# Altium PCB HELIA Lights 2022 V1.0.PcbDoc
Units mm, origin at the board's own origin, x right, y up, seen from the top; angles counter-clockwise.
Board outline 200 x 105.13 mm, 2 copper layers (Top Layer, Bottom Layer); 70 components, 57 nets, 253 pads, 40 vias.
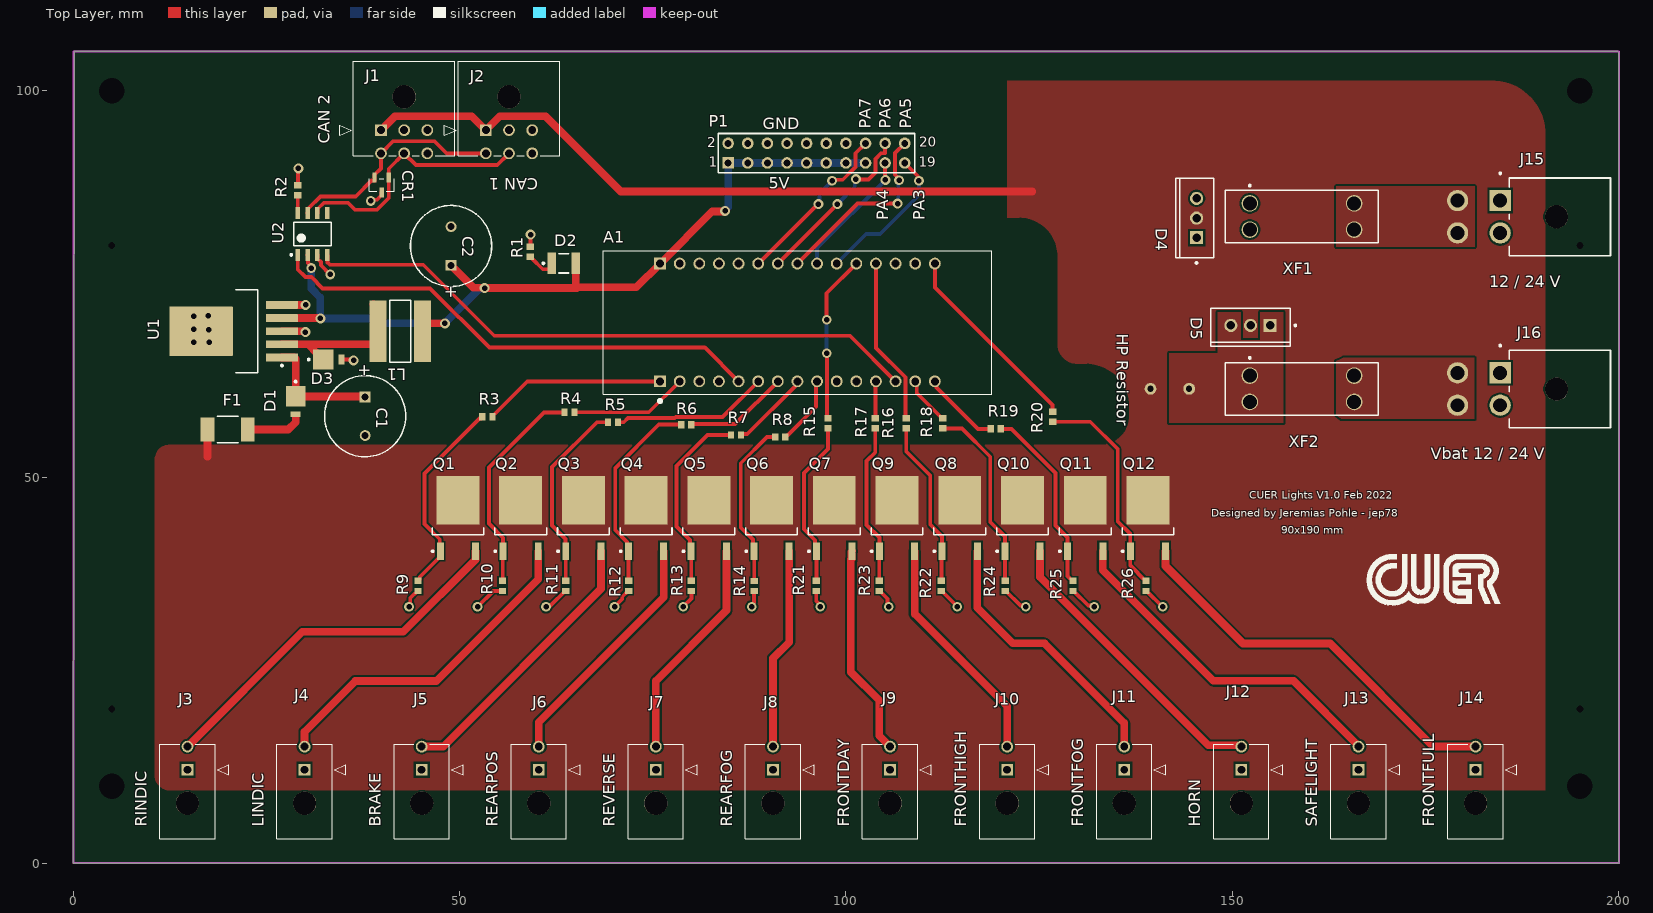
[diagram p0: Top Layer view]
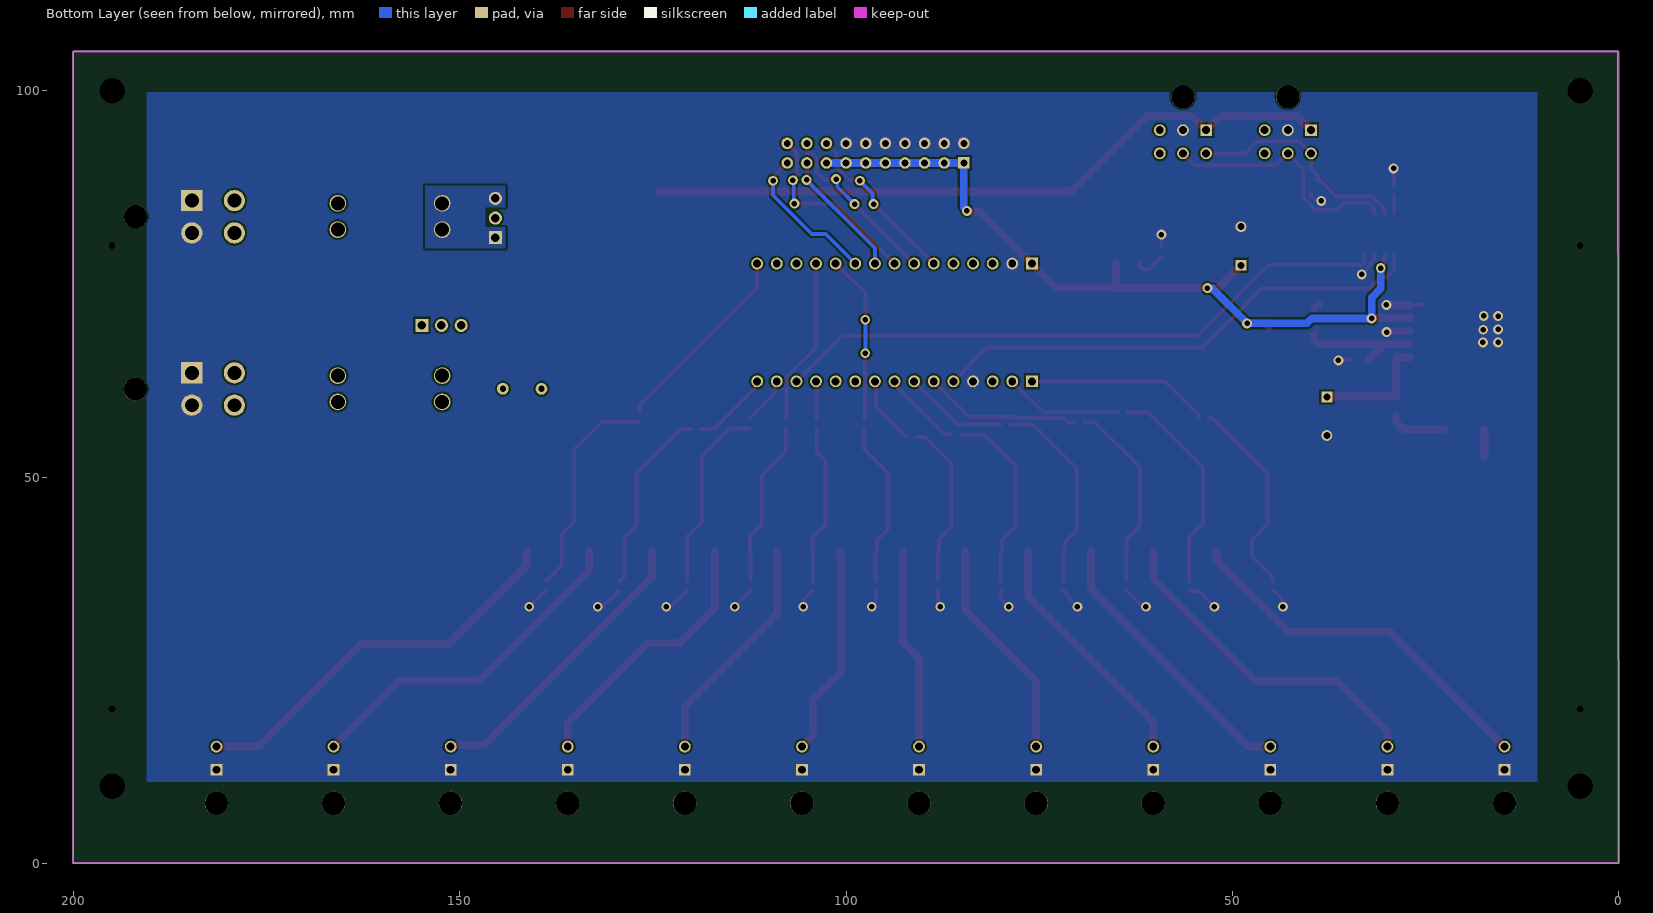
[diagram p1: Bottom Layer view, seen from below]

## Layer stack, top to bottom
Top Solder: solder mask 0.0102, Solder Resist, Dk 3.5
Top Layer: signal copper 0.0356
Dielectric 1: dielectric 0.32, FR-4, Dk 4.6
Bottom Layer: signal copper 0.0356
Bottom Solder: solder mask 0.0102, Solder Resist, Dk 3.5

## Board outline
0,0 200,0 200,105 199.872,105.128 0.156,105.128

## Design rules (kind name [scope] priority, off if disabled: settings)
Clearance [All] p1: gap=0.254 ignorepadtopadclearanceinfootprint=TRUE except(0: Arc-Hole Track-Hole SMDPad-Hole THPad-Hole Via-Hole Fill-Hole Poly-Hole Region-Hole Text-Hole)
FabricationTestPointUsage [All] p1: valid=2 allowmultiple=FALSE
HoleSize [All] p1: absolutevalues=TRUE maxlimit=6.3 minlimit=0.3 maxpercent=80.000 minpercent=20.000
HoleToHoleClearance [All] p1: gap=0.5 allowstackedmicrovias=TRUE
MinimumSolderMaskSliver [All] p1: minsoldermaskwidth=0.1
PolygonConnect [All] p1: connectstyle=Direct reliefconductorwidth=0.508 reliefentries=4 polygonreliefangle="90 Angle" airgapwidth=0.254
RoutingVias [All] p1: holewidth=0.711 width=1.27 viastyle="Through Hole" minholewidth=0.2 minwidth=0.4 maxholewidth=0.711 maxwidth=1.27
SilkToSolderMaskClearance [IsPad] p1: minsilkscreentomaskgap=0.15 clearancetoexposedcopper=TRUE
SolderMaskExpansion [All] p1: expansion=0.05 istentingtop=FALSE
Width [All] p1: maxlimit=1 minlimit=0.175 preferedwidth=0.5
25 further rules are at their usual default settings.

## Classes and differential pairs
component class HELIALights2022V1.0Sheet2: D4 D5 J3 J4 J5 J6 J7 J8 J9 J10 J11 J12 J13 J14 J15 J16 P1 Q1 Q2 Q3 Q4 Q5 Q6 Q7 Q8 Q9 Q10 Q11 Q12 R3 R4 R5 R6 R7 R8 R9 R10 R11 R12 R13 R14 R15 R16 R17 R18 R19 R20 R21 R22 R23 R24 R25 R26 XF1 XF2
component class HELIALights2022V1.0Sheet1: A1 C1 C2 CR1 D1 D2 D3 F1 J1 J2 L1 R1 R2 U1 U2

## Components (designator, comment, footprint, x,y, rotation, side; value= is the part's Value field where it differs from the comment)
A1 "NUCLEO-F303K8" MODULE_NUCLEO-F303K8 93.743,70.013 r90 top
C1 "EEU-FR1C102B" PNSC-EEUFM1H221-2 37.795,57.878 r270 top
C2 "EEU-FR1C102B" PNSC-EEUFM1H221-2 48.912,79.908 r90 top
CR1 "DESD1CAN2SOQ-7" DIODE3_DESD1CAN2SOQ-7_DIO 39.93,87.802 r180 top
D1 "MBRM120LT3G" ONSC-POWERMITE-2-457-04_D_V 28.8,59.141 r270 top
D2 "LTST-C930KGKT" FP-LTST-C930KGKT-MFG 63.506,77.664 r0 top
D3 "MBRM120LT3G" ONSC-POWERMITE-2-457-04_D_V 33.715,65.214 r0 top
D4 "HTR20L120CT" ONSC-TO-220-3-221A-09 145.392,83.523 r180 top
D5 "HTR20L120CT" ONSC-TO-220-3-221A-09 152.374,69.623 r270 top
F1 "1812L035/30DR" FP-1812L035-30DR-MFG 19.998,56.162 r0 top value=0.4-1.7Ω
J1 "430450601" CON_430450601_MOL 39.842,94.898 r180 top
J2 "430450601" CON_430450601_MOL 53.413,94.898 r180 top
J3 "430450202" CON_430450202_MOL 14.8,12.12 r0 top
J4 "430450202" CON_430450202_MOL 29.955,12.12 r0 top
J5 "430450202" CON_430450202_MOL 45.109,12.12 r0 top
J6 "430450202" CON_430450202_MOL 60.264,12.12 r0 top
J7 "430450202" CON_430450202_MOL 75.418,12.12 r0 top
J8 "430450202" CON_430450202_MOL 90.573,12.12 r0 top
J9 "430450202" CON_430450202_MOL 105.727,12.12 r0 top
J10 "430450202" CON_430450202_MOL 136.036,12.12 r0 top
J11 "430450202" CON_430450202_MOL 120.882,12.12 r0 top
J12 "430450202" CON_430450202_MOL 151.191,12.12 r0 top
J13 "430450202" CON_430450202_MOL 166.345,12.12 r0 top
J14 "430450202" CON_430450202_MOL 181.5,12.12 r0 top
J15 "39-30-0040" FP-39-30-0040-MFG 192.233,83.69 r90 top
J16 "39-30-0040" FP-39-30-0040-MFG 192.233,61.398 r90 top
L1 "SRN8040-101M" BOUR-SRN8040-101M_V 42.338,68.881 r0 top
P1 "Header 10X2" HDR2X10 84.77,90.656 r0 top
Q1 "NCE3080K" INF-PG-TO252-3-313_L 49.8,44.7 r90 top
Q2 "NCE3080K" INF-PG-TO252-3-313_L 57.918,44.7 r90 top
Q3 "NCE3080K" INF-PG-TO252-3-313_L 66.036,44.7 r90 top
Q4 "NCE3080K" INF-PG-TO252-3-313_L 74.155,44.7 r90 top
Q5 "NCE3080K" INF-PG-TO252-3-313_L 82.273,44.7 r90 top
Q6 "NCE3080K" INF-PG-TO252-3-313_L 90.391,44.7 r90 top
Q7 "NCE3080K" INF-PG-TO252-3-313_L 98.509,44.7 r90 top
Q8 "NCE3080K" INF-PG-TO252-3-313_L 114.745,44.7 r90 top
Q9 "NCE3080K" INF-PG-TO252-3-313_L 106.627,44.7 r90 top
Q10 "NCE3080K" INF-PG-TO252-3-313_L 122.864,44.7 r90 top
Q11 "NCE3080K" INF-PG-TO252-3-313_L 130.982,44.7 r90 top
Q12 "NCE3080K" INF-PG-TO252-3-313_L 139.1,44.7 r90 top
R1 "2k7" RESC1609X50X30NL8T20 59.176,79.155 r270 top
R2 "10k" RESC1609X50X30NL8T20 29.084,87.123 r90 top
R3 "10k" RESC1609X50X30NL8T20 53.61,57.797 r0 top
R4 "10k" RESC1609X50X30NL8T20 64.243,58.373 r0 top
R5 "10k" RESC1609X50X30NL8T20 69.858,57.096 r0 top
R6 "10k" RESC1609X50X30NL8T20 79.348,56.782 r0 top
R7 "10k" RESC1609X50X30NL8T20 85.789,55.443 r0 top
R8 "10k" RESC1609X50X30NL8T20 91.507,55.181 r0 top
R9 "100k" RESC1609X50X30NL8T20 44.633,35.924 r270 top
R10 "100k" RESC1609X50X30NL8T20 55.576,35.924 r270 top
R11 "100k" RESC1609X50X30NL8T20 63.773,35.928 r270 top
R12 "100k" RESC1609X50X30NL8T20 71.892,35.924 r270 top
R13 "100k" RESC1609X50X30NL8T20 80.017,35.924 r270 top
R14 "100k" RESC1609X50X30NL8T20 88.138,35.893 r270 top
R15 "10k" RESC1609X50X30NL8T20 97.696,56.961 r90 top
R16 "10k" RESC1609X50X30NL8T20 107.823,56.961 r90 top
R17 "10k" RESC1609X50X30NL8T20 103.812,56.961 r90 top
R18 "10k" RESC1609X50X30NL8T20 112.525,56.961 r90 top
R19 "10k" RESC1609X50X30NL8T20 119.398,56.237 r180 top
R20 "10k" RESC1609X50X30NL8T20 126.763,57.816 r90 top
R21 "100k" RESC1609X50X30NL8T20 96.172,35.924 r270 top
R22 "100k" RESC1609X50X30NL8T20 112.346,35.924 r270 top
R23 "100k" RESC1609X50X30NL8T20 104.315,35.924 r270 top
R24 "100k" RESC1609X50X30NL8T20 120.618,35.924 r270 top
R25 "100k" RESC1609X50X30NL8T20 129.399,35.924 r270 top
R26 "100k" RESC1609X50X30NL8T20 138.857,35.924 r270 top
U1 "LM2576S-5.0" KTT0005B_N 20.768,68.881 r180 top
U2 "MCP2551-I/SN" MCHP-SN8_V 30.981,81.458 r90 top
XF1 "3557-2" KSTN-3557-2 159.034,83.723 r0 top
XF2 "3557-2" KSTN-3557-2 159.034,61.423 r0 top

## Footprints (in the part's own frame and the unit in brackets; to place one, negate y for a bottom-side part, rotate by r counter-clockwise, add the part's x,y. Pads: shape width x height; smd on the part's side, far side on the other; paste and mask are expansions set on the pad)
BOUR-SRN8040-101M_V [mm] "SMD, 2-Leads, Body 8x8mm"
  rect 2.2x8 smd: 1(-2.85,0) 2(2.85,0)
  silkscreen extent -1.35,-4 1.35,4, body extent -4,-4 4,4, height 4
CON_430450202_MOL [mm]
  rect 1.52x1.52 hole 1.02 mask+0.076: 1(0,0)
  round 1.52 hole 1.02 mask+0.076: 2(0,3)
  round 3 hole 3 unplated mask+0.076: M1(0,-4.32)
  silkscreen extent -3.57,-8.92 5.35,3.32, body extent 0,0 0.25,0.25, height 0.25
CON_430450601_MOL [mm]
  rect 1.52x1.52 hole 1.02 mask+0.076: 1(0,0)
  round 1.52 hole 1.02 mask+0.076: 2(-3,0) 3(-6,0) 4(0,3) 5(-3,3) 6(-6,3)
  round 3 hole 3 unplated mask+0.076: M1(-3,-4.32)
  silkscreen extent -9.57,-8.92 5.35,3.32, body extent 0,0 0.25,0.25, height 0.25
DIODE3_DESD1CAN2SOQ-7_DIO [mil]
  rect 22x50 smd paste+0 mask+0: 1(-36.02,-38.21) 2(36.02,-38.21) 3(0,38.21)
  silkscreen extent -64,-33 64,33, body extent -59,-49 59,49, height 43
FP-39-30-0040-MFG [mm]
  rect 2.75x2.75 hole 1.8 paste-1000 mask+0: 1(2.095,7.544)
  round 2.75 hole 1.8 paste-1000 mask+0: 2(-2.096,7.544) 3(2.095,13.056) 4(-2.096,13.056)
  round 2.997 hole 2.997 unplated paste-1000 mask+0: ""(0,0.254)
  silkscreen extent -5.02,-6.73 5.74,7.67, body extent -5.12,-6.83 5.12,14.53, height 0.25
FP-1812L035-30DR-MFG [mm]
  rect 1.78x3.15 smd paste+0 mask+0: 1(-2.615,0) 2(2.615,0)
  silkscreen extent -1.35,-1.71 1.35,1.71, body extent -3.6,-1.81 3.6,1.81, height 0.25
FP-LTST-C930KGKT-MFG [mm]
  rect 1.1x2.8 smd paste+0 mask+0: 1(-1.55,0) 2(1.55,0)
  silkscreen extent -2.77,-1.25 0.63,1.25, body extent -2.2,-1.5 2.2,1.5, height 0.25
HDR2X10 [mm] "Connector; Header; 10x2 Position"
  rect 1.5x1.5 hole 0.9: 1(0,0)
  round 1.5 hole 0.9: 2(0,2.54) 3(2.54,0) 4(2.54,2.54) 5(5.08,0) 6(5.08,2.54) 7(7.62,0) 8(7.62,2.54) 9(10.16,0) 10(10.16,2.54) 11(12.7,0) 12(12.7,2.54) 13(15.24,0) 14(15.24,2.54) 15(17.78,0) 16(17.78,2.54) 17(20.32,0) 18(20.32,2.54) 19(22.86,0) 20(22.86,2.54)
  silkscreen extent -1.27,-1.27 24.13,3.81
INF-PG-TO252-3-313_L [mm] "DPAK, 3-Leads, Body 6.5x6.12mm, Pitch 2.28mm, IPC High Density"
  rect 2.25x0.9 smd: 1(-4.3,2.28) 3(-4.3,-2.28)
  rect 6.3x5.55 smd: 2(2.3,0)
  silkscreen extent -4.42,-3.35 -1.25,3.4, body extent -2.15,-3.32 4.07,3.32, height 2.35
KSTN-3557-2 [mm] "Fuse Holder, PCB Mount, Thru-Hole, Body 19.8x6.8mm, Height 7.4mm"
  round 2.15 hole 1.8: 1(-6.75,1.7) 2(-6.75,-1.7) 3(6.75,1.7) 4(6.75,-1.7)
  silkscreen extent -9.9,-3.4 9.9,4.12, body extent -9.91,-3.37 9.91,3.37, height 7.74
KTT0005B_N [mm] "DPAK, 5-Leads, Body 10.65x9.65mm, Pitch 1.7mm, IPC Medium Density"
  rrect10% 4.15x1 smd: 1(-6.25,3.4) 2(-6.25,1.7) 3(-6.25,0) 4(-6.25,-1.7) 5(-6.25,-3.4)
  rrect2% 8.2x6.4 smd: 6(4.2,0)
  silkscreen extent -6.38,-5.35 -0.3,5.35, body extent -3.15,-5.32 6.5,5.33, height 4.83
MCHP-SN8_V [mm] "SOIC, 8-Leads, Body 4.9x3.9mm, Pitch 1.27mm"
  rect 1.55x0.6 smd: 1(-2.7,1.905) 2(-2.7,0.635) 3(-2.7,-0.635) 4(-2.7,-1.905) 5(2.7,-1.905) 6(2.7,-0.635) 7(2.7,0.635) 8(2.7,1.905)
  silkscreen extent -2.82,-2.45 1.53,2.88, body extent -3,-2.45 3,2.45, height 1.75
MODULE_NUCLEO-F303K8 [mm]
  rect 1.53x1.53 hole 1.02: 3.1(-7.62,17.78) 4.1(7.62,17.78)
  round 1.53 hole 1.02: 3.2(-7.62,15.24) 3.3(-7.62,12.7) 3.4(-7.62,10.16) 3.5(-7.62,7.62) 3.6(-7.62,5.08) 3.7(-7.62,2.54) 3.8(-7.62,0) 3.9(-7.62,-2.54) 3.10(-7.62,-5.08) 3.11(-7.62,-7.62) 3.12(-7.62,-10.16) 3.13(-7.62,-12.7) 3.14(-7.62,-15.24) 3.15(-7.62,-17.78) 4.2(7.62,15.24) 4.3(7.62,12.7) 4.4(7.62,10.16) 4.5(7.62,7.62) 4.6(7.62,5.08) 4.7(7.62,2.54) 4.8(7.62,0) 4.9(7.62,-2.54) 4.10(7.62,-5.08) 4.11(7.62,-7.62) 4.12(7.62,-10.16) 4.13(7.62,-12.7) 4.14(7.62,-15.24) 4.15(7.62,-17.78)
  silkscreen extent -10.36,-25.14 9.27,25.14
ONSC-POWERMITE-2-457-04_D_V [mm] "POWERMITE, 2-Leads, Body 1.965x1.9mm"
  rect 2.67x2.54 smd: 1(-1.335,0)
  rect 0.762x1.27 smd: 2(1.016,0)
  silkscreen extent -3.34,-0.12 -3.1,0.13, body extent -2.04,-0.95 -0.08,0.95, height 1.15
ONSC-TO-220-3-221A-09 [mm] "FM, 3-Leads, Body 10.3x4.85mm, Pitch 2.54mm"
  rect 1.7x1.7 hole 1.1: 1(0,2.54)
  round 1.7 hole 1.1: 2(0,0) 3(0,-2.54)
  silkscreen extent -2.2,-5.15 2.7,5.92, body extent -2.18,-5.15 2.67,5.15, height 19.85
PNSC-EEUFM1H221-2 [mm] "THD, 2-Leads, Dia 10.5mm, Body Length 17.5mm, Pin Spacing 5mm"
  rect 1.4x1.4 hole 0.9: 1(-2.5,0)
  round 1.4 hole 0.9: 2(2.5,0)
  silkscreen extent -5.25,-5.25 5.25,5.25, body extent -5.25,-5.25 5.25,5.25, height 17.5
RESC1609X50X30NL8T20 [mm] "Chip Resistor, 2-Leads, Body 1.65x0.95mm, IPC Medium Density"
  rect 0.8x0.95 smd: 1(-0.65,0) 2(0.65,0)
  body extent -0.82,-0.48 0.82,0.48, height 0.5

## Part data
A1: "STM32F303K8, mbed-Enabled Development Nucleo-32 STM32F3 ARMÂ® CortexÂ®-M4 MCU 32-Bit Embedded Evaluation Board", Package=None, Availability=Unavailable, MF=STMicroelectronics, MP=NUCLEO-F303K8, Price=None, SnapEDA_Link=https://www.snapeda.com/parts/NUCLEO-F303K8/STMicroelectronics/view-part/276791/?ref=snap
C1 C2: library part CMP-2000-05313-1, "Aluminum Electrolytic Capacitor, 1000 uF, +/- 20%, 16 V, -40 to 105 degC, 2-Pin THD, RoHS, Tape and Reel", Capacitance=1000µF, Case Size/Dimension=Ø10x16mm, Lifetime@Temperature=8000Hrs@105degC, Manufacturer=Panasonic, Operating Temp Range=-40to+105degC, Operating Temp-Max=105degC, Rated Voltage=16V, Ripple Current=1790mA, Datasheet URL=http://www.produktinfo.conrad.com/datenblaetter/425000-449999/446746-da-01-en-ALU_KONDENSATOR_FR_R_1000_UF_16V.pdf, Datasheet Version=Nov-11, Impedance=0.028O, Manufacturer URL=http://www.panasonic.com/, Series=FR, Type=Radial
CR1: "No Description Available", Mfr_Name="Diodes Inc", Copyright="Copyright (C) 2022 Ultra Librarian. All rights reserved.", Manufacturer_Part_Number=DESD1CAN2SOQ-7, RefDes=RefDes, Type=DEV
D1 D3: library part CMP-1055-00263-1, "Schottky Power Rectifier, 2-Pin Powermite, Pb-Free, Tape and Reel", Manufacturer="On Semiconductor", PartNumber=MBRM120LT1G, ComponentLink1Description="Manufacturer URL", ComponentLink1URL=http://www.onsemi.com/, ComponentLink2Description=Datasheet, ComponentLink2URL=http://www.onsemi.cn/pub_link/Collateral/MBRM120L-D.PDF, ComponentLink3Description="Package Specification", ComponentLink3URL=http://www.onsemi.com/pub_link/Collateral/457-04.PDF, Configuration=Single, DatasheetVersion="Rev. 7", IFSM Max (A)=50, Mounting Technology="Surface Mount", PackageDescription="2-Pin POWERMITE, Body 1.965 x 1.9 mm", PackageReference=POWERMITE-2-457-04, PackageVersion="Rev. F, 05/2013", Packing="Tape and Reel", RoHS=TRUE
D2: library part CMP-2000-06626-2, "LED GREEN CLEAR CHIP SMD", Case Code (Imperial)=1209, Case Code (Metric)=3224, Color=Green, Forward Current=30mA, Forward Voltage=2V, Lens Color=Colorless, Max Operating Temperature=85°C, Min Operating Temperature=-55°C, Package Quantity=1, Power Dissipation=75mW, Reverse Voltage=5V, Test Current=20mA, Case/Package=1209, Depth=2.4mm, Dominant Wavelength=571nm, Height=2.4mm, Illumination Color=Green, Lead Free="Lead Free", Length=3.2mm, Lens Style=Diffused, Lens Transparency=Clear, Luminous Intensity=600mcd, Mount="Surface Mount", Number of Elements=1, Number of LEDs=1, Number of Pins=2, Packaging="Tape and Reel", Power Rating=75mW, Radiation Hardening=No, RoHS Compliant=Yes, Series=-, Viewing Angle=25°, Voltage=5V, Wavelength=574nm, Width=2.4mm
D4 D5: library part CMP-1055-00618-1, "SWITCHMODE(TM) Power Rectifier, 60 V, 30 A, 3-Pin TO-220, Pb-Free, Tube", Manufacturer="On Semiconductor", PartNumber=MBR30H60CTG, ComponentLink1Description="Manufacturer URL", ComponentLink1URL=http://www.onsemi.com/, ComponentLink2Description=Datasheet, ComponentLink2URL=http://www.onsemi.cn/pub_link/Collateral/MBRB30H60CT-D.PDF, ComponentLink3Description="Package Specification", ComponentLink3URL=http://www.onsemi.com/pub_link/Collateral/221A-09.PDF, Configuration="Common Cathode", DatasheetVersion="Rev. 10", IFSM Max (A)=260, Mounting Technology="Through Hole", PackageDescription="3-Pin Flange Mount, Vertical Straight Lead, Body 9.97 x 4.445 mm, Pitch 2.54 mm", PackageReference=TO-220-3-221A-09, PackageVersion="Rev. AG, 09/2011", Packing=Tube, RoHS=TRUE
F1: library part CMP-08606-000005-1, "PTC RESET FUSE 30V 350MA 1812", Ambient Temperature Range High=+85°C, Ambient Temperature Range Low=-40°C, Current Rating=40A, Hold Current=0.35A, Manufacturer="Littelfuse Inc", Package=0, Resistance=0.4-1.7Ω, Temperature="-40°C to +85°C", Trip Current=0.75A, Voltage Rating=30V, Automotive=No, Category=Fuse, ComponentLink2Description=Datasheet, ComponentLink2URL=https://www.littelfuse.com/~/media/electronics/datasheets/resettable_ptcs/littelfuse_ptc_1812l_datasheet.pdf.pdf, Device Class L1="Circuit Protection", Device Class L2="PTC Resettable Fuses", Device Class L3=unset, Digikey Description="PTC RESET FUSE 30V 350MA 1812", Height=1.25mm, Lead Free=Yes, Manufacturer Part Number=1812L035/30DR, Mouser Description="Resettable Fuses - PPTC PTC 30V POLY 1812 HALOGEN-FREE .35A", Octopart=https://octopart.com/1812l035%2F30dr-littelfuse-19645438, RoHS=TRUE, Temperature Range High=+85°C, Temperature Range Low=-40°C, Trip Time=0.15s
J1 J2 J3 J4 J5 J6 J7 J8 J9 J10 J11 J12 J13 J14: "No Description Available", Mfr_Name="Molex Connector Corporation", Copyright="Copyright (C) 2022 Ultra Librarian. All rights reserved.", RefDes=RefDes, Type=DEV
  J1 J2: Manufacturer_Part_Number=430450601
  J3 J4 J5 J6 J7 J8 J9 J10 J11 J12 J13 J14: Manufacturer_Part_Number=430450202
J15 J16: library part CMP-2000-05600-2, "CONN HEADER R/A 4POS 4.2MM", Current Rating=13A, Manufacturer=Molex, Temperature="-40°C to +105°C", Temperature Range High=+105°C, Temperature Range Low=-40°C, Voltage Rating=600V, Automotive=No, Category=Conn, ComponentLink2Description=Datasheet, ComponentLink2URL=https://www.molex.com/webdocs/datasheets/pdf/en-us/0039300040_PCB_HEADERS.pdf, Conn Gender=Male, Conn Orientation="Right Angle", Contact Material=Gold,Nickel, Device Class L1=Connectors, Device Class L2="Headers and Wire Housings", Device Class L3=unset, Digikey Description="CONN HEADER R/A 4POS 4.2MM", Footprint Url=https://www.molex.com/pdm_docs/sd/039300040_sd.pdf, Lead Free=Yes, Manufacturer Part Number=39-30-0040, Mouser Description="Headers & Wire Housings 4 CKT R/A HEADER", Number Of Contacts=4, Number Of Rows=2, Octopart=https://octopart.com/39-30-0040-molex-277428, Package=39-30-0040, Pitch=4.2mm, RoHS=TRUE, Standoff Height=0.4mm
L1: library part CMP-2000-07143-1, "Semi-Shielded Power Inductor, 100 uH, -40 to 125 degC, 2-Pin SMD, RoHS, Tape and Reel", Current, Rating="1 /  / A", Inductance="100 /  / µH", Manufacturer=Bourns, Package Description="2-Pin Surface Mount Device, Body 8 x 8 mm", Tolerance="±20 /  / %", Brand/Series=SRN8040Series, Datasheet URL=http://www.produktinfo.conrad.com/datenblaetter/1000000-1099999/001056456-da-01-en-MAG_ABG_LEIST_IND_SRN8040_101M_100UH_SMD.pdf, Datasheet Version=08/2013, Manufacturer URL=http://www.bourns.com/, Mounting Technology=SurfaceMount, Package Reference=SRN8040-101M, Termination=SMT, Type=Power
P1: "Header, 10-Pin, Dual row", LatestRevisionDate=17-Jul-2002, LatestRevisionNote="Re-released for DXP Platform.", Publisher="Altium Limited"
Q1 Q2 Q3 Q4 Q5 Q6 Q7 Q8 Q9 Q10 Q11 Q12: library part CMP-1164-00349-1, "N-Channel CoolMOS E6 Power-Transistor, 600 V VDS, 7.3 A ID, -55 to 150 degC, PG-TO252-3-313, Reel, Green", Manufacturer=Infineon, PartNumber=IPD60R600C6, ComponentLink1Description="Manufacturer URL", ComponentLink1URL=http://www.infineon.com/, ComponentLink2Description=Datasheet, ComponentLink2URL=http://www.infineon.com/dgdl/IPD60R600C6_2_0.pdf?folderId=db3a30431ff98815012019af55de3f2c&fileId=db3a30432239cccd0122a83152b97d6f, ComponentLink3Description="Package Specification", ComponentLink3URL=http://www.infineon.com/dgdl/PG-TO252-3-313-Package_Overview.pdf?folderId=db3a30432b57a660012b81890ade72d2&fileId=db3a30432b57a660012b8193af2872eb, DatasheetVersion="Rev. 2.0", Green=TRUE, ID (max)="7.3Â A", IDpuls (max)="19Â A", Mounting Technology="Surface Mount", PackageDescription="3-Pin Plastic (Green) Transistor Single Outline Package, 6.5 x 6.12 mm Body, 2.28 mm Pitch", PackageReference=PG-TO252-3-313, PackageVersion=Oct-10, Packing=Reel, Polarity=N, Ptot (max)="63Â W", QG="20.5Â nC", RDS (on) (max)="600Â mOhm", Rth="2Â K/W", RthJA (max)="62Â K/W", RthJC (max)="2Â K/W", Technology="CoolMOS C6", VDS (max)="600Â V", VGS(th) (max)="3.5Â V", VGS(th) (min)="2.5Â V"
R1 R2 R3 R4 R5 R6 R7 R8 R9 R10 R11 R12 R13 R14 R15 R16 R17 R18 R19 R20 R21 R22 R23 R24 R25 R26: library part CMP-2000-03816-5, "Chip Resistor, 0 Ohm, Jumper, 100 mW, -55 to 155 degC, 0603 (1608 Metric), RoHS, Tape and Reel", Manufacturer="Vishay Semiconductor", Max Operating Temperature="155 degC", Min Operating Temperature="-55 degC", Package Quantity=5000, Voltage Rating="75 V", ComponentLink1Description="Manufacturer URL", ComponentLink1URL=http://www.vishay.com/, ComponentLink2Description=Datasheet, ComponentLink2URL=http://www.vishay.com/docs/20035/dcrcwe3.pdf, DatasheetVersion=06/2012, Height="0.45 mm", Length="1.55 mm", Mount="Surface Mount", Mounting Technology="Surface Mount", PackageDescription="2-Pin Surface Mount Device, Body 1.575 x 0.85 mm", PackageReference=0603, Packaging="Tape and Reel", Pins=2, REACH SVHC=Unknown, RoHSCompliant=true
U1: library part CMP-0069-00115-3, "SIMPLE SWITCHER® 3A Step-Down Voltage Regulator, 5-pin TO-263", Manufacturer="Texas Instruments", PackageTopMarking="NSUZXYTTE#*LM2576S*-5.0 P+", PowerWise=N, Code_JEDEC=MO-169-AB, ComponentLink1Description="Datasheet URL", ComponentLink1URL=http://www.ti.com/general/docs/lit/getliterature.tsp?genericPartNumber=LM2576&fileType=pdf, CompType=Switcher, PackageDescription="TO-263, Molded, .400 x .390 x .180in, 5 Lead, .067in Pitch, Surface Mount", PackageReference=KTT0005B, PinCount=5, RoHS=N
U2: library part CMP-0186-00138-3, "High-Speed CAN Transceiver, /  1 Mb/s, 4.5 to 5.5 V, 8-Pin SOIC (SN), Industrial Temperature, RoHS, Tube", Manufacturer=Microchip, ComponentLink1Description="Manufacturer URL", ComponentLink1URL=http://www.microchip.com/, ComponentLink2Description=Datasheet, ComponentLink2URL=http://ww1.microchip.com/downloads/en/DeviceDoc/21667f.pdf, ComponentLink3Description="Package Specification", ComponentLink3URL=http://www.microchip.com/stellent/groups/techpub_sg/documents/packagingspec/en012702.pdf, DatasheetVersion="Rev. F, 07/2010", Mounting Technology="Surface Mount", PackageDescription="8-Pin Small Outline Integrated Circuit, Body 4.9 x 3.9 mm, Pitch 1.27 mm", PackageReference=SN8, RoHSCompliant=true
XF1 XF2: library part CMP-2000-05461-1, "FUSE HOLDER, PCB MOUNT, 500VAC, 20A, ROHS", Current Rating=30A, Manufacturer=Keystone-Electronics, Voltage=500V, Category=CircuitProtection, Contact Finish=TinNickel, Contact Material=Brass, Datasheet URL=http://datasheet.octopart.com/3557-2-Keystone-datasheet-15715937.pdf, Datasheet Version=Apr-13, Family=Fuseholders, For Use With/Related Products=ATC,ATO257,MINI897, Fuse Size="0.43\"Lx0.15\"Wx0.64\"H(10.92mmx3.81mmx16.25mm)", Fuse Type=Blade, Fuseholder Type=Block, Manufacturer URL=http://www.keyelco.com/, Mounting Type=PCB, Number of Circuits=1, Orientation=Vertical, Series=-, Termination Style=PCPin

## Free pads (board coordinates)
  round 1.524 hole 0.8: 10(139.434,61.423) 10(144.434,61.423)
  round 1.524 hole 3.3 unplated: 11(5,10) 12(5,100) 13(195,100) 14(195,10)
  round 0 hole 0.9 unplated: 15(5,20) 16(195,20) 17(195,80) 18(5,80)

## Via types
v1: diameter 1.27, hole 0.711, Top Layer to Bottom Layer, 40 vias

## Nets (pads, with @x,y where several pads share a name; then routed paths per layer and width w, separated by ;. In a path a pad name is that pad's centre, name@x,y a point inside that pad or via, vN(x,y) a via of type N, cw(c..) or ccw(c..) an arc to the next point about the centre after c; other vN are vias at no path point)
5V: A1.4.1 C2.1 D2.2 L1.2 P1.1 P1.3 P1.5 P1.7 P1.9 P1.11 P1.13 P1.15 U1.4 U2.2 | length 108.7
  Top Layer w0.5: U2.2 30.396,78.708 30.396,77.687 30.818,77.265 v1(30.818,77.056)
  Top Layer w1: U1.4 31.949,70.581 v1(31.998,70.532) ; L1.2@45.285,69.513 45.667,69.894 v1(48.113,69.894) ; C2.1 51.812,74.508 53.198,74.508 v1(53.25,74.457) 65.166,74.457 65.056,74.567 ; D2.2 65.056,74.567 ; v1@84.368,84.363 v1(84.368,84.436) 84.316,84.385 82.715,84.385 A1.4.1 72.897,74.567 65.056,74.567
  Bottom Layer w1: v1(30.818,77.056) 30.818,74.41 31.998,73.23 v1(31.998,70.532) 39.737,70.532 40.374,69.894 v1(48.113,69.894) 52.624,74.405 53.198,74.405 v1(53.25,74.457) ; v1(84.368,84.436) 84.368,84.51 84.77,84.912 P1.1 P1.3 P1.5 P1.7 P1.9 P1.11 P1.13 P1.15
"+12 / +24": D4.2 D5.2 F1.1 J1.1 J2.1 pad.10@139.434,61.423 Q1.2 Q2.2 Q3.2 Q4.2 Q5.2 Q6.2 Q7.2 Q8.2 Q9.2 Q10.2 Q11.2 Q12.2 | length 94.1
  Top Layer w1: 17.377,52.637 17.383,52.643 F1.1 ; J1.1 41.655,96.71 51.601,96.71 J2.1 55.219,96.704 61.139,96.704 70.889,86.954 124.121,86.954
BRAKECONN: J5.2 Q3.3 | length 36.5
  Top Layer w1: J5.2 47.887,15.12 68.316,35.55 Q3.3
CAN_RX: A1.3.13 U2.4 | length 80.9
  Top Layer w0.5: U2.4 32.936,78.708 32.936,77.766 33.228,77.473 45.315,77.473 54.495,68.293 100.542,68.293 A1.3.13
CAN_TX: A1.3.5 U2.1 | length 64.9
  Top Layer w0.5: U2.1 29.076,76.877 30.08,75.873 30.831,75.873 32.275,74.43 46.205,74.43 53.872,66.763 81.753,66.763 A1.3.5
CANH: CR1.2 J1.4 J2.4 U2.7 | length 29.4
  Top Layer w0.5: U2.7 30.396,84.208 30.396,84.726 31.999,86.329 36.572,86.329 38.63,88.388 38.986,88.388 39.015,88.417 CR1.2 39.015,89.128 39.842,89.956 J1.4 41.409,93.464 46.793,93.464 48.36,91.898 J2.4
CANL: CR1.1 J1.5 J2.5 U2.6 | length 32.5
  Top Layer w0.5: U2.6 31.666,84.208 31.666,84.726 32.446,85.506 35.559,85.506 36.464,84.601 39.327,84.601 40.845,86.119 40.845,89.9 J1.5 44.36,90.381 54.896,90.381 J2.5
FRONTDAYCONN: J9.2 Q7.3 | length 27.4
  Top Layer w1: Q7.3 100.739,40.35 100.739,39.411 100.656,39.328 100.656,24.777 104.339,21.094 104.339,16.508 J9.2
FRONTFORGCONN: J11.2 Q9.3 | length 30.3
  Top Layer w0.3: J11.2 J11.2@120.9,15.138
  Top Layer w1: Q9.3 108.907,32.293 120.882,20.318 J11.2
FRONTFULLCONN: J14.2 Q12.3 | length 51.7
  Top Layer w1: Q12.3 141.38,38.487 151.403,28.464 162.683,28.464 176.026,15.12 J14.2
FRONTHIGHCONN: J10.2 Q8.3 | length 35.6
  Top Layer w0.3: Q8.3@117,40.375 Q8.3
  Top Layer w1: Q8.3 117.025,33.093 121.618,28.5 125.7,28.5 136.036,18.164 J10.2
GND: A1.3.4 A1.4.2 C1.2 C2.2 CR1.3 D3.2 J1.2 J2.2 J3.1 J4.1 J5.1 J6.1 J7.1 J8.1 J9.1 J10.1 J11.1 J12.1 J13.1 J14.1 J15.1 J15.2 J16.1 J16.2 P1.2 P1.4 P1.6 P1.8 P1.10 P1.12 P1.14 R1.1 R2.2 R9.2 R10.2 R11.2 R12.2 R13.2 R14.2 R21.2 R22.2 R23.2 R24.2 R25.2 R26.2 U1.3 U1.5 U1.6 U2.3 | length 54.6
  Top Layer w0.5: U1.5@25.443,72.281 U1.5 ; R2.2 29.119,87.808 29.119,89.909 v1(29.154,89.944) ; U2.3 31.666,78.708 31.666,78.233 32.082,77.817 32.082,77.416 v1(33.267,76.23) ; D3.2 36.168,65.214 v1(36.288,65.094) ; v1(38.53,85.74) 38.678,85.888 39.342,85.888 39.93,86.476 CR1.3 ; v1(43.479,33.219) 43.626,33.367 43.626,34.342 44.558,35.274 R9.2 ; v1(52.347,33.219) 54.402,35.274 R10.2 ; v1(59.199,81.383) 59.176,81.36 R1.1 R1.1@59.202,79.831 ; v1(61.215,33.219) 61.362,33.367 61.787,33.367 63.698,35.278 R11.2 ; v1(70.082,33.219) 71.062,34.199 71.062,34.519 71.817,35.274 R12.2 71.892,35.146 R12.2@71.913,35.124 ; v1(78.95,33.219) 80.017,34.286 R13.2 R13.2@80.004,35.262 ; v1(87.818,33.219) 87.818,33.428 88.138,33.747 R14.2 ; R14.2@88.14,35.214 R14.2@88.154,35.227 ; R21.2@96.148,35.25 R21.2 96.172,33.941 96.686,33.428 v1(96.686,33.219) ; R23.2@104.369,35.22 R23.2 104.39,35.274 105.407,34.257 105.407,33.367 v1(105.554,33.219) ; R22.2@112.414,35.207 R22.2 112.421,35.274 114.422,33.273 v1(114.422,33.219) ; R24.2@120.615,35.124 120.618,35.127 R24.2 120.693,35.274 122.601,33.367 123.143,33.367 v1(123.29,33.219) ; R25.2 129.474,35.274 131.382,33.367 132.011,33.367 v1(132.158,33.219) ; R26.2 138.932,35.274 140.987,33.219 v1(141.026,33.219)
  Top Layer w1: U1.3 29.865,68.881 29.987,68.759 v1(30.06,68.759) ; U1.5 30.077,72.281 v1(30.083,72.287)
  other v1: 15.643,67.427 17.59,67.427 17.55,69.063 15.643,69.105 15.626,70.834 17.499,70.86
HORNCONN: J12.2 Q10.3 | length 38.5
  Top Layer w1: Q10.3 125.144,37.056 146.907,15.293 150.651,15.293 150.724,15.219 151.091,15.219 J12.2
LINDICCONN: J4.2 Q2.3 | length 43.9
  Top Layer w1: J4.2 29.955,17.027 36.527,23.6 47.001,23.6 60.198,36.797 Q2.3
NetC1_1: C1.1 D1.1 U1.1 | length 15.7
  Top Layer w0.5: D1.1@28.791,61.6 D1.1@28.8,61.591
  Top Layer w1: U1.1 28.593,65.481 28.8,65.274 28.8,61.591 D1.1 28.849,60.427 37.746,60.427 C1.1
NetD1_2: D1.2 F1.2 | length 7.4
  Top Layer w1: F1.2 27.858,56.162 28.8,57.104 D1.2@28.8,57.905
NetD2_1: D2.1 R1.2 | length 4.1
  Top Layer w0.5: R1.2 59.251,78.505 59.401,78.355 59.401,78.28 60.779,76.901 61.656,76.901 61.956,77.201 D2.1
NetD3_1: D3.1 L1.1 U1.2 | length 17
  Top Layer w1: U1.2 30.413,67.181 ; D3.1 32.315,65.214 31.545,65.984 31.545,66.049 30.413,67.181 ; L1.1@38.888,72.38 39.42,71.847 L1.1@39.42,71.846 ; L1.1@39.488,68.456 39.488,67.781 38.888,67.181 30.413,67.181
NetD4_1: D4.1 D4.3 XF1.1 XF1.2 | length 0.3
  Top Layer w0.5: D4.3 D4.3@145.716,86.063
NetD5_1: D5.1 D5.3 pad.10@144.434,61.423 XF2.1 XF2.2
NetJ15_3: J15.3 J15.4 XF1.3 XF1.4 | length 0.2
  Top Layer w0.5: XF1.3@165.742,85.173 XF1.3@165.742,85.423
NetJ16_3: J16.3 J16.4 XF2.3 XF2.4 | length 0.9
  Top Layer w0.5: XF2.4 XF2.4@166.231,59.723 ; XF2.3 XF2.3@166.231,63.123
NetQ1_1: Q1.1 R3.1 R9.1 | length 26.5
  Top Layer w0.5: R9.1 44.708,36.574 44.858,36.724 44.858,37.063 47.52,39.725 Q1.1 47.443,40.477 47.443,41.958 45.485,43.916 45.485,50.476 52.581,57.572 52.81,57.572 52.96,57.722 R3.1
NetQ2_1: Q2.1 R4.1 R10.1 | length 28.2
  Top Layer w0.5: R10.1 55.607,36.605 55.607,40.369 Q2.1 55.638,42.142 53.803,43.977 53.803,51.233 60.943,58.373 R4.1
NetQ3_1: Q3.1 R5.1 R11.1 | length 25
  Top Layer w0.5: R11.1@63.756,36.594 Q3.1 63.737,40.419 63.737,41.982 61.995,43.724 61.995,51.29 67.801,57.096 R5.1
NetQ4_1: Q4.1 R6.1 R12.1 | length 26.2
  Top Layer w0.5: R12.1 71.883,36.583 71.883,40.391 Q4.1 71.675,40.6 71.675,41.619 70.17,43.124 70.17,51.162 75.79,56.782 R6.1
NetQ5_1: Q5.1 R7.1 R13.1 | length 24.4
  Top Layer w0.5: R13.1 80.005,36.586 80.005,40.388 Q5.1 79.824,40.568 79.824,41.867 78.11,43.581 78.11,51.456 82.097,55.443 R7.1
NetQ6_1: Q6.1 R8.1 R14.1 | length 21.9
  Top Layer w0.5: R14.1@88.159,36.574 88.159,40.352 Q6.1 87.984,40.527 87.984,41.909 86.41,43.483 86.41,51.79 89.802,55.181 R8.1 R8.1@90.923,55.181
NetQ7_1: Q7.1 R15.1 R21.1 | length 21.7
  Top Layer w0.5: R21.1 96.201,36.603 96.201,40.372 Q7.1 96.029,40.6 96.029,41.832 94.611,43.25 94.611,50.547 97.696,53.632 R15.1
NetQ8_1: Q8.1 R16.1 R22.1 | length 21.7
  Top Layer w0.5: R16.1 107.823,53.308 110.926,50.206 110.926,43.868 112.465,42.328 Q8.1 112.406,40.34 112.406,36.634 R22.1
NetQ9_1: Q9.1 R17.1 R23.1 | length 20.9
  Top Layer w0.5: R17.1 103.812,53.205 102.7,52.094 102.7,43.811 104.347,42.164 Q9.1 104.331,40.384 104.331,36.591 R23.1
NetQ10_1: Q10.1 R18.1 R24.1 | length 24.5
  Top Layer w0.5: R18.1 115.019,56.311 118.701,52.629 118.701,44.177 120.584,42.295 Q10.1 120.601,40.383 120.601,36.591 R24.1
NetQ11_1: Q11.1 R19.1 R25.1 | length 24.4
  Top Layer w0.5: R19.1 121.431,56.237 127.152,50.516 127.152,43.755 128.702,42.205 Q11.1 128.702,37.196 129.324,36.574 R25.1
NetQ12_1: Q12.1 R20.1 R26.1 | length 28.5
  Top Layer w0.5: R20.1 131.639,57.166 135.19,53.614 135.19,44.272 136.82,42.642 Q12.1 136.82,38.536 138.782,36.574 R26.1
NetR2_1: R2.1 U2.8 | length 2.3
  Top Layer w0.5: U2.8 29.08,84.162 29.08,86.469 R2.1
PA3: A1.4.10 P1.19 | length 19.2
  Top Layer w0.5: P1.19 109.315,88.971 109.315,88.49 v1(109.462,88.343)
  Bottom Layer w0.5: A1.4.10 102.652,81.461 104.457,81.461 109.462,86.467 v1(109.462,88.343)
PA4: A1.4.9 P1.17 | length 16.7
  Top Layer w0.5: P1.17 105.09,88.503 v1(105.127,88.467)
  Bottom Layer w0.5: A1.4.9 96.283,79.622 v1(105.127,88.467)
PA5: A1.4.8 P1.20 | length 24.8
  Top Layer w0.5: A1.4.8 101.498,85.388 v1(106.698,85.388) ; v1(106.886,88.404) 106.886,88.612 106.376,89.122 106.376,91.942 P1.20
  Bottom Layer w0.5: v1(106.698,85.388) 106.792,85.482 106.792,88.309 v1(106.886,88.404)
PA6: A1.4.7 P1.18 | length 22.7
  Top Layer w0.5: A1.4.7 91.209,77.633 98.901,85.325 v1(98.907,85.325) ; v1(101.299,88.56) 101.359,88.501 102.934,88.501 103.836,89.403 103.836,91.175 104.571,91.91 105.09,91.91 P1.18
  Bottom Layer w0.5: v1(98.907,85.325) 101.152,87.57 101.152,88.413 v1(101.299,88.56)
PA7: A1.4.6 P1.16 | length 22.1
  Top Layer w0.5: A1.4.6 88.714,77.633 96.406,85.325 v1(96.457,85.325) ; v1(98.216,88.343) 98.346,88.473 99.601,88.473 101.264,90.136 101.264,91.91 P1.16
  Bottom Layer w0.5: v1(96.457,85.325) 96.584,85.452 96.584,86.71 v1(98.216,88.343)
PINBRAKE: A1.3.6 R5.2 | length 20.3
  Top Layer w0.5: R5.2 71.268,57.096 71.807,57.635 77.856,57.635 78.006,57.785 84.055,57.785 A1.3.6
PINFRONTDAY: A1.4.11 R15.2 | length 21.7
  Top Layer w0.5: v1(97.523,66.031) 97.554,66 97.554,57.752 R15.2 ; v1(97.523,70.356) 97.523,73.793 A1.4.11
  Bottom Layer w0.5: v1(97.523,66.031) v1(97.523,70.356)
PINFRONTFOG: A1.3.12 R17.2 | length 4.8
  Top Layer w0.5: R17.2 103.857,57.656 103.857,62.347 A1.3.12
PINFRONTFULL: A1.4.15 R20.2 | length 25.5
  Top Layer w0.5: A1.4.15 111.523,74.54 126.74,59.323 126.74,58.489 R20.2
PINFRONTHIGH: A1.4.12 R16.2 | length 21.6
  Top Layer w0.5: A1.4.12 103.903,66.727 107.714,62.916 107.714,57.72 R16.2
PINHORN: A1.3.14 R18.2 | length 6.3
  Top Layer w0.5: A1.3.14 109.18,62.196 109.18,60.881 112.45,57.611 R18.2
PINLINDIC: A1.3.2 R4.2 | length 15.3
  Top Layer w0.5: R4.2@64.893,58.389 74.499,58.389 A1.3.2
PINREARFOG: A1.3.9 R8.2 | length 8.9
  Top Layer w0.5: R8.2@92.223,55.181 92.223,55.256 92.373,55.406 92.448,55.406 96.141,59.1 96.141,62.251 A1.3.9
PINREARPOS: A1.3.7 R6.2 | length 13.5
  Top Layer w0.5: R6.2 80.073,56.857 85.668,56.857 A1.3.7
PINREVERSE: A1.3.8 R7.2 | length 10.4
  Top Layer w0.5: R7.2 86.567,55.57 87.247,55.57 93.546,61.869 93.546,62.196 A1.3.8
PINRINDIC: A1.3.1 R3.2 | length 23.7
  Top Layer w0.5: R3.2 54.26,57.872 58.781,62.393 A1.3.1
PINSAFELIGHT: A1.3.15 R19.2 | length 10.1
  Top Layer w0.5: A1.3.15 111.72,62.196 111.72,61.613 117.096,56.237 R19.2
REARFOGCONN: J8.2 Q6.3 | length 26.1
  Top Layer w1: J8.2 90.573,26.551 92.671,28.65 Q6.3
REARPOSCONN: J6.2 Q4.3 | length 32
  Top Layer w1: J6.2 60.264,18.264 76.435,34.435 Q4.3
REVERSECONN: J7.2 Q5.3 | length 29.1
  Top Layer w1: J7.2 75.4,15.138 75.4,23.6 84.553,32.753 Q5.3
RINDICCONN: J3.2 Q1.3 | length 48.4
  Top Layer w1: J3.2 29.66,29.98 42.74,29.98 52.08,39.319 Q1.3
SAFELIGHTCONN: J13.2 Q11.3 | length 45
  Top Layer w1: Q11.3 133.262,37.938 147.565,23.635 157.939,23.635 J13.2@166.4,15.175
pads on no net: A1.3.3 A1.3.10 A1.3.11 A1.4.3 A1.4.4 A1.4.5 A1.4.13 A1.4.14 J1.3 J1.6 J1.M1 J2.3 J2.6 J2.M1 J3.M1 J4.M1 J5.M1 J6.M1 J7.M1 J8.M1 J9.M1 J10.M1 J11.M1 J12.M1 J13.M1 J14.M1 J15. J16. U2.5

## Polygon pours and split planes (outlines as drawn)
"+12 / +24" on Top Layer "+12_/_+24_L01_P029" (solid, pour order 29): 122.443,83.576 120.902,83.576 120.902,101.265 183.698,101.265 cw(c183.698,94.462) 190.5,94.462 190.5,9.5 12.121,9.5 cw(c12.511,11.417) 10.594,11.807 10.594,52.301 cw(c12.497,52.301) 12.497,54.204 132.975,54.204 ccw(c132.976,57.926) 136.697,57.926 136.697,59.117 ccw(c131.151,59.117) 131.151,64.664 129.96,64.664 cw(c129.96,67.204) 127.42,67.204 127.42,78.599 ccw(c122.443,78.6)
NetJ15_3 on Top Layer "NETJ15_3_L01_P026" (solid, remove dead copper, pour order 26): 181.381,87.623 181.381,79.791 163.492,79.791 163.492,81 163.492,86.523 163.492,87.623 168.617,87.623 170.115,87.623
NetJ16_3 on Top Layer "NETJ16_3_L01_P027" (solid, pour order 27): 181.351,57.523 169.999,57.523 164.127,57.523 163.484,58.023 163.484,65.023 164.384,65.423 181.351,65.423
NetD5_1 on Top Layer "NETD5_1_L01_P028" (solid, pour order 28): 156.634,71.323 153.634,71.323 153.634,67.723 151.134,67.723 151.134,71.323 148.134,71.323 148.134,66.023 141.834,66.023 141.834,57.023 156.634,57.023
GND on Bottom Layer "GND_L02_P031" (solid, pour order 31): 10.596,99.789 10.596,10.6 190.504,10.6 190.504,99.789
NetD4_1 on Bottom Layer "NETD4_1_L02_P030" (solid, pour order 30): 154.492,87.723 144.092,87.723 144.092,84.923 146.692,84.923 146.692,82.323 144.092,82.323 144.092,79.623 146.992,79.623 154.492,79.623

## Keep-outs
Keep-Out Layer:
  lines w0.254: 0.05,0.05 200.05,0.05 200.05,105.05 0.05,105.05 0.05,0.05

## Silkscreen, mask and mechanical layers (free items; w line width, h text height)
Top Overlay:
  drawing of 4 lines, arcs and shapes, not listed
  text "PA7" at 103.243,95.076 h1.52 r90
  text "PA6" at 105.846,95.076 h1.52 r90
  text "PA5" at 108.448,95.076 h1.52 r90
  text "GND" at 89.23,95.026 h1.52
  text "CAN 2" at 33.231,93.128 h1.52 r90
  text "CAN 1" at 60.201,88.684 h1.52 r180
  text "5V" at 90.032,87.329 h1.52
  text "PA4" at 105.501,83.249 h1.52 r90
  text "PA3" at 110.241,83.249 h1.52 r90
  text "12 / 24 V" at 183.257,74.562 h1.52
  text "HP Resistor" at 135.088,68.569 h1.52 r270
  text "Vbat 12 / 24 V" at 175.734,52.285 h1.52
  text "CUER Lights V1.0 Feb 2022" at 152.229,47.188 h1
  text "Designed by Jeremias Pohle - jep78" at 147.304,44.881 h1
  text "90x190 mm" at 156.345,42.685 h1
  text "RINDIC" at 9.546,4.754 h1.52 r90
  text "LINDIC" at 24.691,4.754 h1.52 r90
  text "BRAKE" at 39.837,4.754 h1.52 r90
  text "REARPOS" at 54.982,4.754 h1.52 r90
  text "REVERSE" at 70.128,4.754 h1.52 r90
  text "REARFOG" at 85.273,4.754 h1.52 r90
  text "FRONTDAY" at 100.419,4.754 h1.52 r90
  text "FRONTHIGH" at 115.564,4.754 h1.52 r90
  text "FRONTFOG" at 130.71,4.754 h1.52 r90
  text "HORN" at 145.855,4.754 h1.52 r90
  text "SAFELIGHT" at 161.001,4.754 h1.52 r90
  text "FRONTFULL" at 176.146,4.754 h1.52 r90

## Text inside footprints (layer, text, board x,y; h text height)
C1: Top Overlay "+" at 37.047,64.659 h1.5 r270
C2: Top Overlay "+" at 49.612,73.108 h1.5 r90
J1: Mechanical 3 "PTH_DRILL_SIZE:_1.02_MM,_TOLERANCE:_+0.05/-0.05" at 57.765,110.398 h1.27 r180; Mechanical 3 "NPTH_DRILL_SIZE:_3.0_MM,_TOLERANCE:_+0.05/-0.05" at 57.842,110.418 h1.27 r180; Mechanical 10 "PTH_DRILL_SIZE:_1.02_MM,_TOLERANCE:_+0.05/-0.05" at 57.765,110.398 h1.27 r180; Mechanical 10 "NPTH_DRILL_SIZE:_3.0_MM,_TOLERANCE:_+0.05/-0.05" at 58.042,111.218 h1.27 r180
J2: Mechanical 3 "NPTH_DRILL_SIZE:_3.0_MM,_TOLERANCE:_+0.05/-0.05" at 71.313,110.818 h1.27 r180; Mechanical 3 "PTH_DRILL_SIZE:_1.02_MM,_TOLERANCE:_+0.05/-0.05" at 71.335,110.398 h1.27 r180; Mechanical 10 "NPTH_DRILL_SIZE:_3.0_MM,_TOLERANCE:_+0.05/-0.05" at 71.213,111.018 h1.27 r180; Mechanical 10 "PTH_DRILL_SIZE:_1.02_MM,_TOLERANCE:_+0.05/-0.05" at 71.335,110.398 h1.27 r180
J3: Mechanical 3 "NPTH_DRILL_SIZE:_3.0_MM,_TOLERANCE:_+0.05/-0.05" at 5.3,22.481 h1.27; Mechanical 3 "PTH_DRILL_SIZE:_1.02_MM,_TOLERANCE:_+0.05/-0.05" at 7.1,22.381 h1.27; Mechanical 10 "NPTH_DRILL_SIZE:_3.0_MM,_TOLERANCE:_+0.05/-0.05" at 5.6,21.181 h1.27; Mechanical 10 "PTH_DRILL_SIZE:_1.02_MM,_TOLERANCE:_+0.05/-0.05" at 6.9,19.981 h1.27
J4: Mechanical 3 "NPTH_DRILL_SIZE:_3.0_MM,_TOLERANCE:_+0.05/-0.05" at 13.345,21.381 h1.27; Mechanical 3 "PTH_DRILL_SIZE:_1.02_MM,_TOLERANCE:_+0.05/-0.05" at 18.145,25.981 h1.27; Mechanical 10 "NPTH_DRILL_SIZE:_3.0_MM,_TOLERANCE:_+0.05/-0.05" at 14.245,25.381 h1.27; Mechanical 10 "PTH_DRILL_SIZE:_1.02_MM,_TOLERANCE:_+0.05/-0.05" at 20.445,22.881 h1.27
J5: Mechanical 3 "NPTH_DRILL_SIZE:_3.0_MM,_TOLERANCE:_+0.05/-0.05" at 31.991,23.081 h1.27; Mechanical 3 "PTH_DRILL_SIZE:_1.02_MM,_TOLERANCE:_+0.05/-0.05" at 29.991,23.581 h1.27; Mechanical 10 "NPTH_DRILL_SIZE:_3.0_MM,_TOLERANCE:_+0.05/-0.05" at 30.691,23.081 h1.27; Mechanical 10 "PTH_DRILL_SIZE:_1.02_MM,_TOLERANCE:_+0.05/-0.05" at 58.109,3.1 h1.27
J6: Mechanical 3 "NPTH_DRILL_SIZE:_3.0_MM,_TOLERANCE:_+0.05/-0.05" at 41.036,26.381 h1.27; Mechanical 3 "PTH_DRILL_SIZE:_1.02_MM,_TOLERANCE:_+0.05/-0.05" at 43.936,22.881 h1.27; Mechanical 10 "NPTH_DRILL_SIZE:_3.0_MM,_TOLERANCE:_+0.05/-0.05" at 44.136,22.881 h1.27; Mechanical 10 "PTH_DRILL_SIZE:_1.02_MM,_TOLERANCE:_+0.05/-0.05" at 53.236,23.481 h1.27
J7: Mechanical 3 "NPTH_DRILL_SIZE:_3.0_MM,_TOLERANCE:_+0.05/-0.05" at 54.982,30.181 h1.27; Mechanical 3 "PTH_DRILL_SIZE:_1.02_MM,_TOLERANCE:_+0.05/-0.05" at 57.382,23.881 h1.27; Mechanical 10 "NPTH_DRILL_SIZE:_3.0_MM,_TOLERANCE:_+0.05/-0.05" at 58.382,29.681 h1.27; Mechanical 10 "PTH_DRILL_SIZE:_1.02_MM,_TOLERANCE:_+0.05/-0.05" at 57.482,22.581 h1.27
J8: Mechanical 3 "NPTH_DRILL_SIZE:_3.0_MM,_TOLERANCE:_+0.05/-0.05" at 58.427,22.381 h1.27; Mechanical 3 "PTH_DRILL_SIZE:_1.02_MM,_TOLERANCE:_+0.05/-0.05" at 63.627,22.181 h1.27; Mechanical 10 "NPTH_DRILL_SIZE:_3.0_MM,_TOLERANCE:_+0.05/-0.05" at 64.127,29.181 h1.27; Mechanical 10 "PTH_DRILL_SIZE:_1.02_MM,_TOLERANCE:_+0.05/-0.05" at 67.027,27.381 h1.27
J9: Mechanical 3 "NPTH_DRILL_SIZE:_3.0_MM,_TOLERANCE:_+0.05/-0.05" at 62.573,27.781 h1.27; Mechanical 3 "PTH_DRILL_SIZE:_1.02_MM,_TOLERANCE:_+0.05/-0.05" at 67.773,28.181 h1.27; Mechanical 10 "NPTH_DRILL_SIZE:_3.0_MM,_TOLERANCE:_+0.05/-0.05" at 61.773,26.381 h1.27; Mechanical 10 "PTH_DRILL_SIZE:_1.02_MM,_TOLERANCE:_+0.05/-0.05" at 72.073,24.681 h1.27
J10: Mechanical 3 "NPTH_DRILL_SIZE:_3.0_MM,_TOLERANCE:_+0.05/-0.05" at 119.764,18.581 h1.27; Mechanical 3 "PTH_DRILL_SIZE:_1.02_MM,_TOLERANCE:_+0.05/-0.05" at 118.764,24.581 h1.27; Mechanical 10 "NPTH_DRILL_SIZE:_3.0_MM,_TOLERANCE:_+0.05/-0.05" at 116.264,26.281 h1.27; Mechanical 10 "PTH_DRILL_SIZE:_1.02_MM,_TOLERANCE:_+0.05/-0.05" at 119.464,26.081 h1.27
J11: Mechanical 3 "NPTH_DRILL_SIZE:_3.0_MM,_TOLERANCE:_+0.05/-0.05" at 106.218,23.181 h1.27; Mechanical 3 "PTH_DRILL_SIZE:_1.02_MM,_TOLERANCE:_+0.05/-0.05" at 106.818,20.781 h1.27; Mechanical 10 "NPTH_DRILL_SIZE:_3.0_MM,_TOLERANCE:_+0.05/-0.05" at 106.918,24.381 h1.27; Mechanical 10 "PTH_DRILL_SIZE:_1.02_MM,_TOLERANCE:_+0.05/-0.05" at 103.418,24.381 h1.27
J12: Mechanical 3 "NPTH_DRILL_SIZE:_3.0_MM,_TOLERANCE:_+0.05/-0.05" at 128.709,32.381 h1.27; Mechanical 3 "PTH_DRILL_SIZE:_1.02_MM,_TOLERANCE:_+0.05/-0.05" at 124.809,32.181 h1.27; Mechanical 10 "NPTH_DRILL_SIZE:_3.0_MM,_TOLERANCE:_+0.05/-0.05" at 125.509,32.181 h1.27; Mechanical 10 "PTH_DRILL_SIZE:_1.02_MM,_TOLERANCE:_+0.05/-0.05" at 142.8,23.3 h1.27
J13: Mechanical 3 "NPTH_DRILL_SIZE:_3.0_MM,_TOLERANCE:_+0.05/-0.05" at 141.555,31.281 h1.27; Mechanical 3 "PTH_DRILL_SIZE:_1.02_MM,_TOLERANCE:_+0.05/-0.05" at 133.152,41.544 h1.27; Mechanical 10 "NPTH_DRILL_SIZE:_3.0_MM,_TOLERANCE:_+0.05/-0.05" at 145,27.4 h1.27; Mechanical 10 "PTH_DRILL_SIZE:_1.02_MM,_TOLERANCE:_+0.05/-0.05" at 140.955,35.381 h1.27
J14: Mechanical 3 "NPTH_DRILL_SIZE:_3.0_MM,_TOLERANCE:_+0.05/-0.05" at 147.2,31.981 h1.27; Mechanical 3 "PTH_DRILL_SIZE:_1.02_MM,_TOLERANCE:_+0.05/-0.05" at 143,34.581 h1.27; Mechanical 10 "NPTH_DRILL_SIZE:_3.0_MM,_TOLERANCE:_+0.05/-0.05" at 149.701,41.726 h1.27; Mechanical 10 "PTH_DRILL_SIZE:_1.02_MM,_TOLERANCE:_+0.05/-0.05" at 146.6,31.981 h1.27
P1: Top Overlay "20" at 109.487,92.721 h1.27; Top Overlay "19" at 109.47,90.171 h1.27; Top Overlay "1" at 82.23,90.148 h1.27; Top Overlay "2" at 82.082,92.694 h1.27